# Altium PCB 324 Electrode Wafer PCB.PcbDoc (part 1 of 2)
Units mm, origin at the board's own origin, x right, y up, seen from the top; angles counter-clockwise.
Board outline 565 x 565 mm, 2 copper layers (Top Layer, Bottom Layer); 5 components, 324 nets, 648 pads, 0 vias.
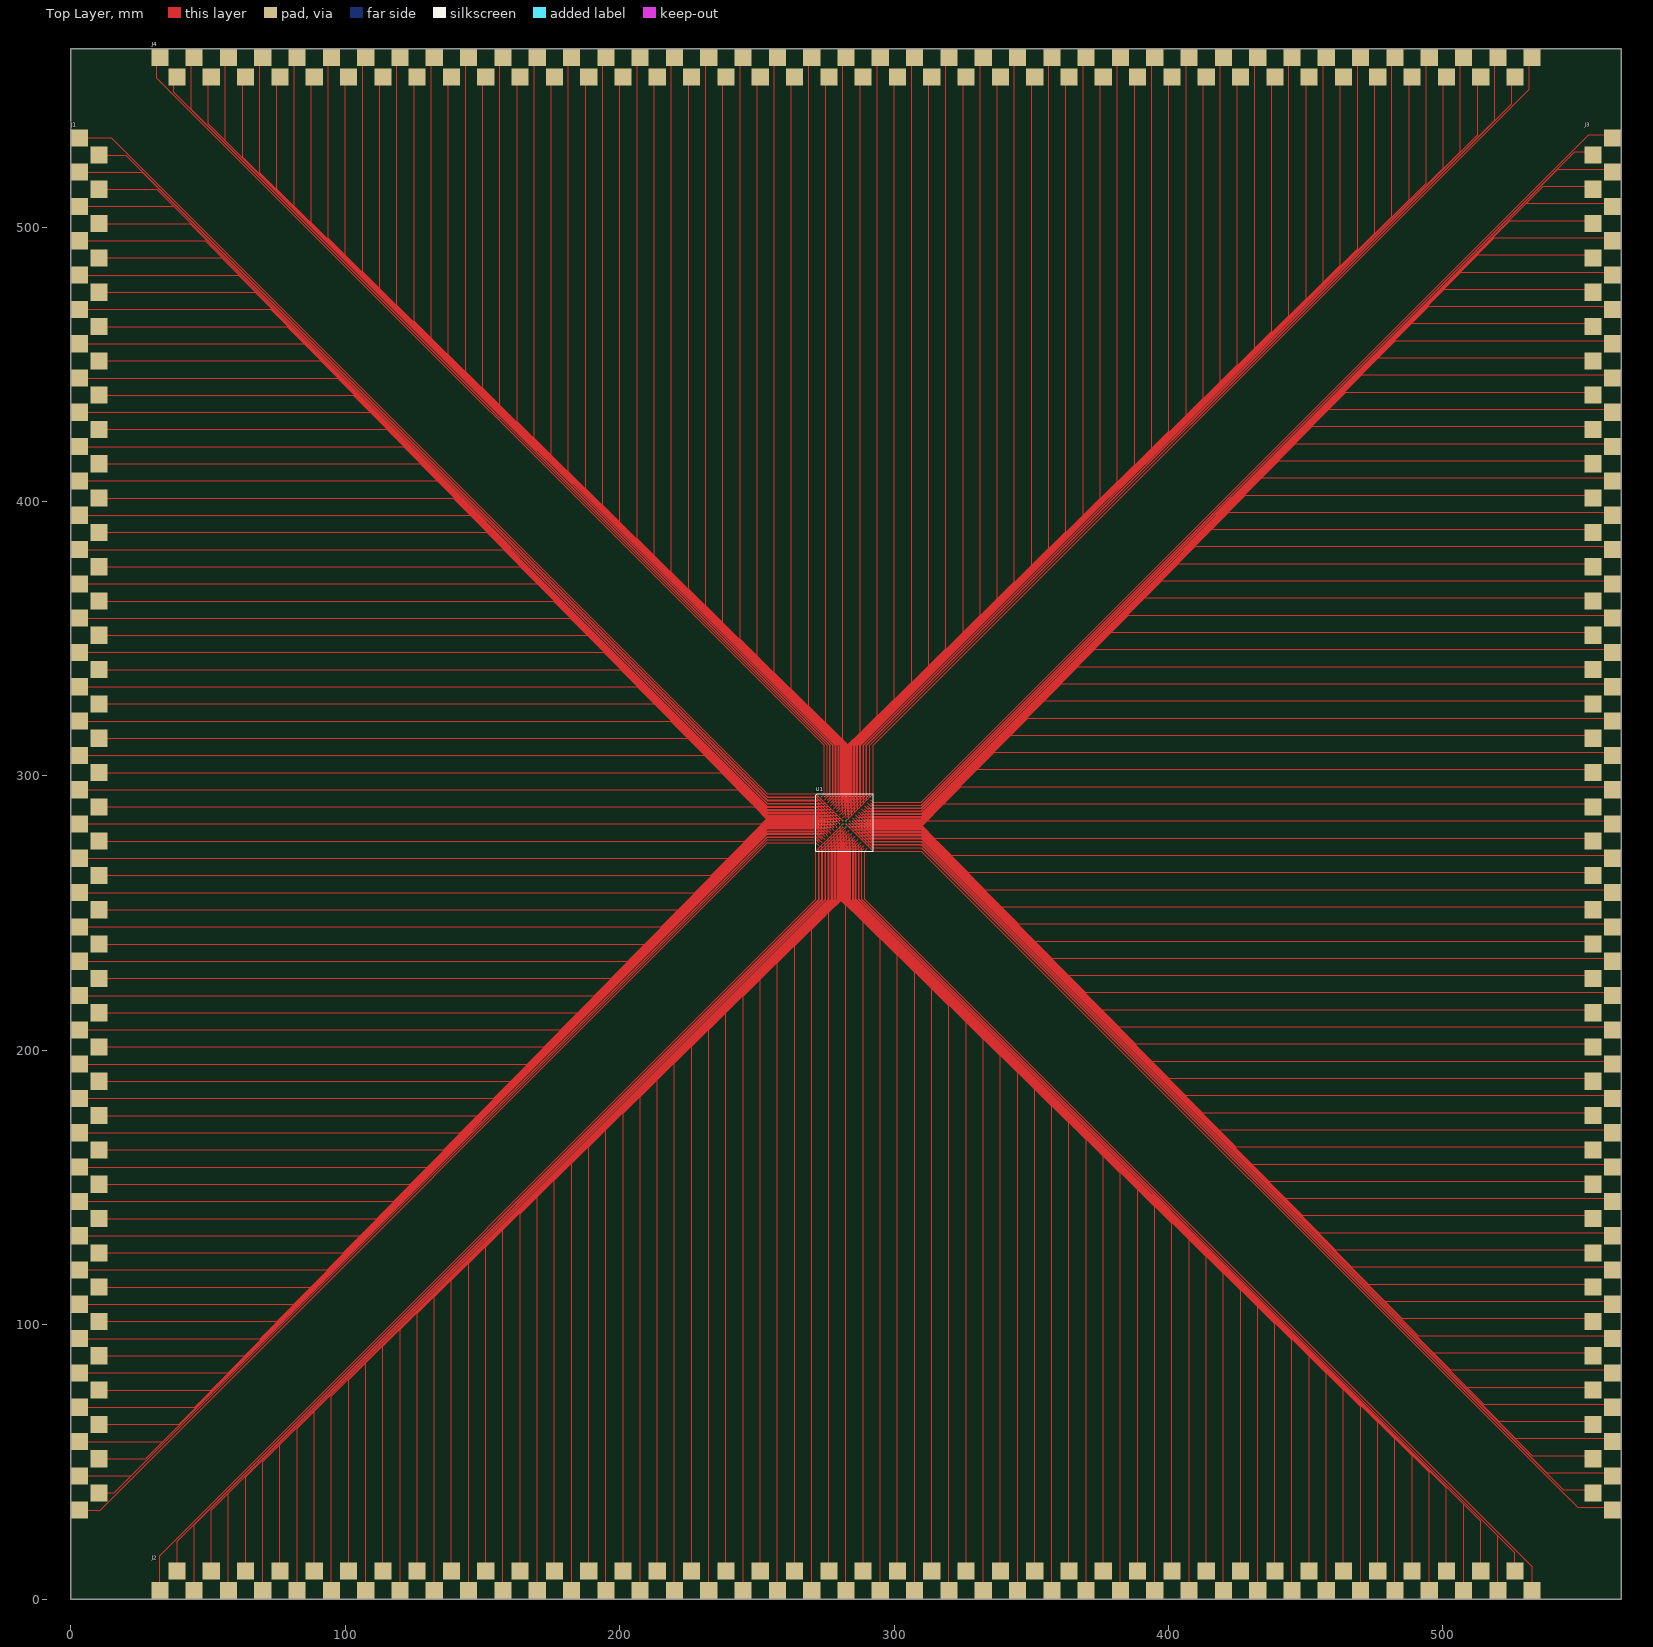
[diagram p0: Top Layer view]
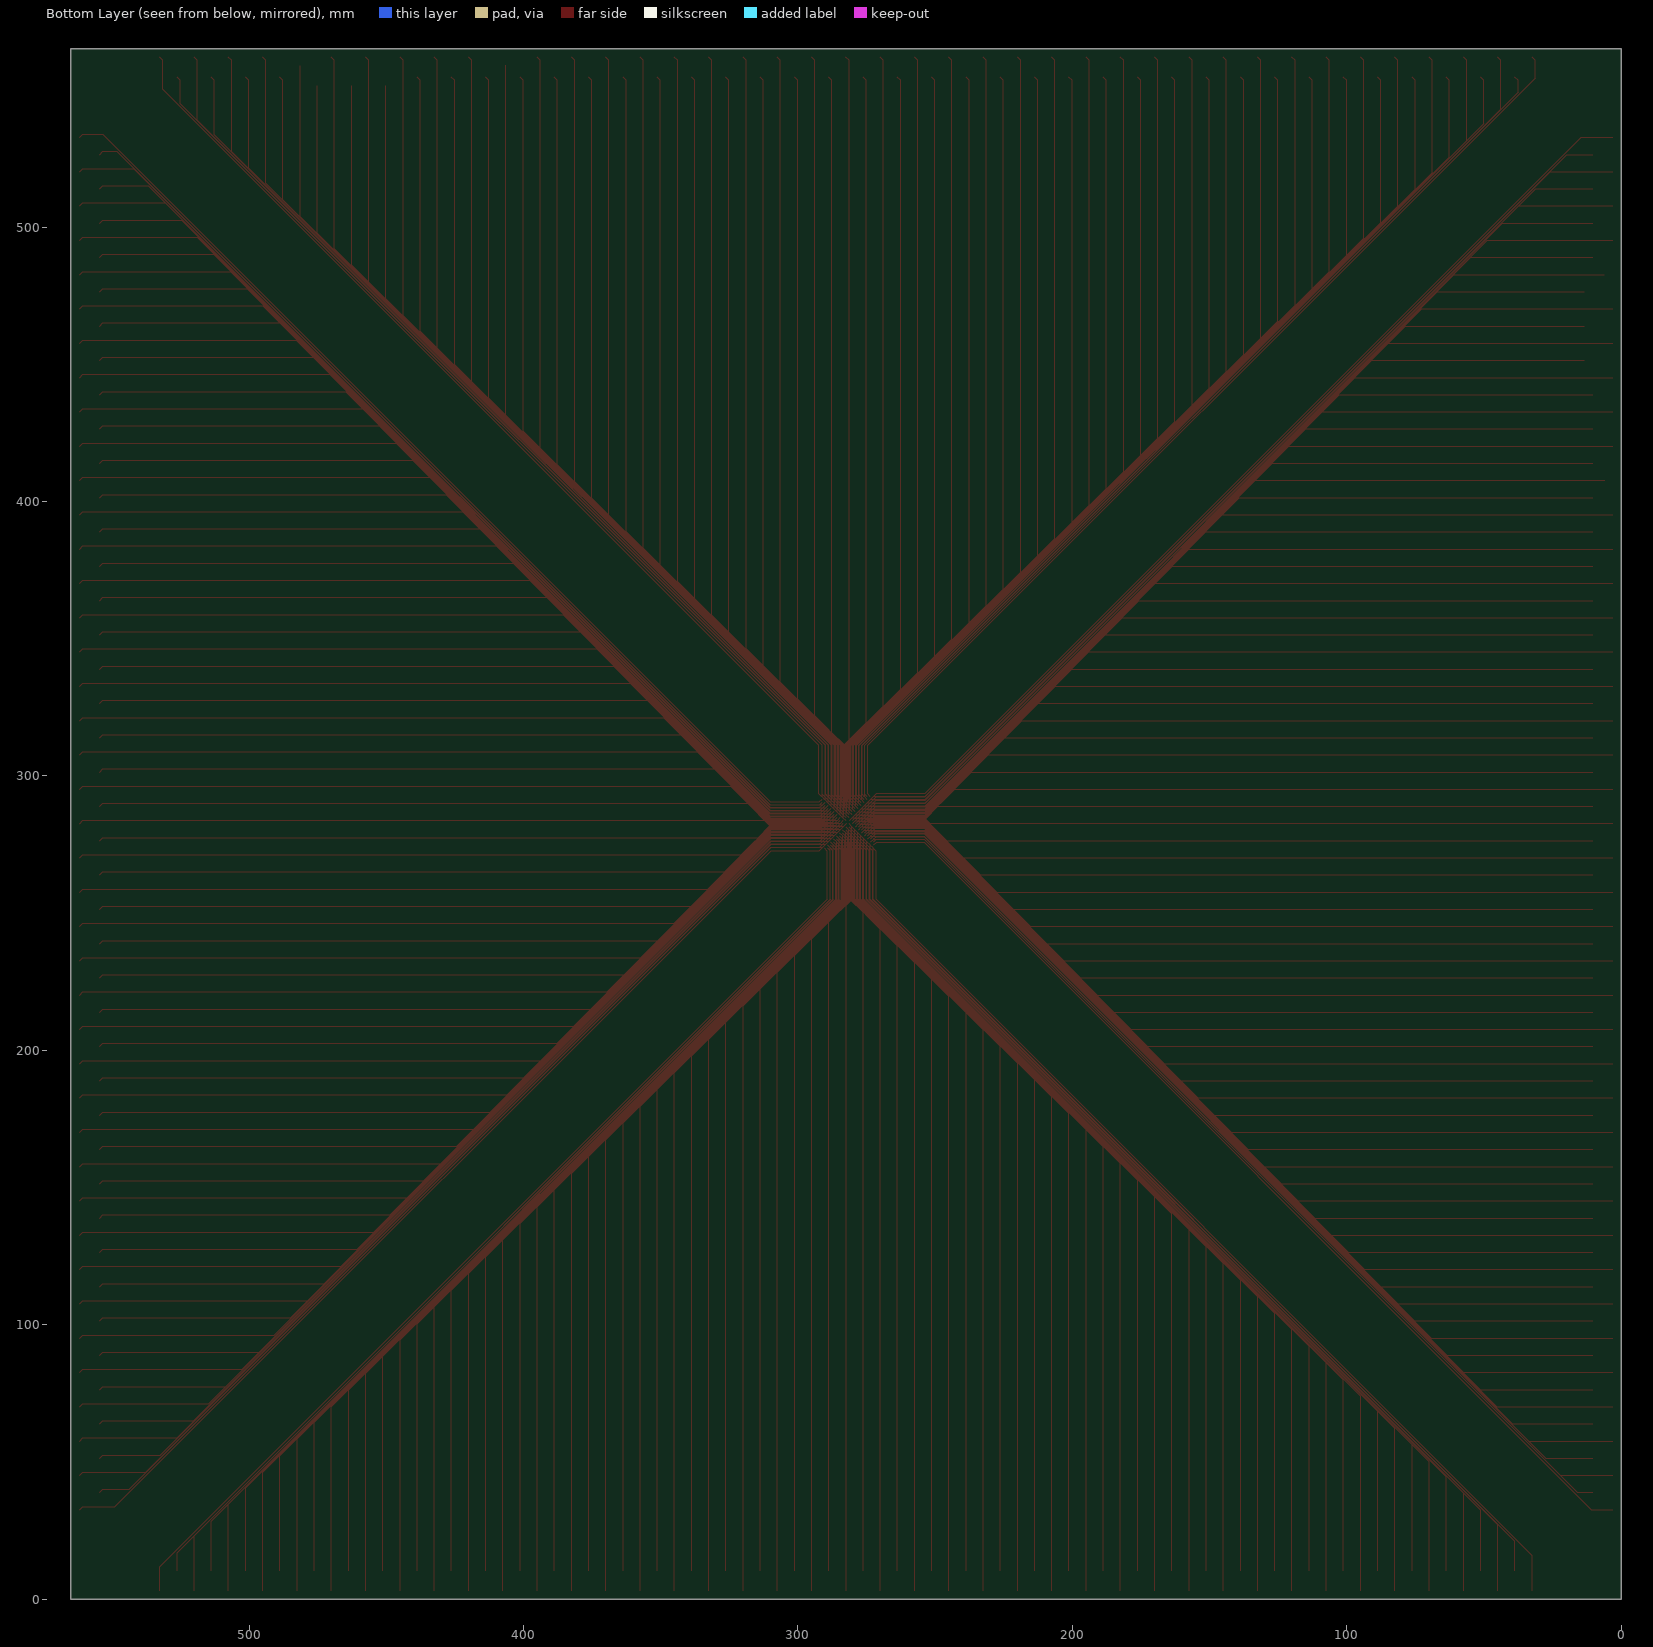
[diagram p1: Bottom Layer view, seen from below]

## Layer stack, top to bottom
Top Solder: solder mask 0.0102, Solder Resist, Dk 3.5
Top Layer: signal copper 0.0356
Dielectric 1: dielectric 0.32, FR-4, Dk 4.8
Bottom Layer: signal copper 0.0356
Bottom Solder: solder mask 0.0102, Solder Resist, Dk 3.5

## Board outline
0,0 565,0 565,565 0,565

## Design rules (kind name [scope] priority, off if disabled: settings)
Clearance [All] p1: gap=0.254 ignorepadtopadclearanceinfootprint=FALSE except(0: Arc-Hole Track-Hole SMDPad-Hole THPad-Hole Via-Hole Fill-Hole Poly-Hole Region-Hole Text-Hole; 0.03: Arc-Arc Arc-Track Arc-SMDPad Arc-THPad Arc-Via Track-Track Track-SMDPad Track-THPad Track-Via)
PolygonConnect [All] p1: connectstyle=Relief reliefconductorwidth=0.254 reliefentries=4 polygonreliefangle="90 Angle" airgapwidth=0.254
RoutingVias [All] p1: holewidth=0.711 width=1.27 viastyle="Through Hole" minholewidth=0.711 minwidth=1.27 maxholewidth=0.711 maxwidth=1.27
SolderMaskExpansion [All] p1: expansion=0.102 istentingtop=FALSE
Width [All] p1: maxlimit=0.254 minlimit=0.05 preferedwidth=0.254 toplayer_maxwidth=0.05 toplayer_prefwidth=0.05 bottomlayer_minwidth=0.254 minimp=50.000000 maximp=50.000000 favimp=50.000000
30 further rules are at their usual default settings.

## Classes and differential pairs
component class "324 Electrode Wafer Schematic": J1 J2 J3 J4

## Components (designator, comment, footprint, x,y, rotation, side; value= is the part's Value field where it differs from the comment)
J1 "Bond Pads (81)" "Bond Pads (81)" 3.125,-76.5 r0 top
J2 "Bond Pads (81)" "Bond Pads (81)" 641.5,3.125 r90 top
J3 "Bond Pads (81)" "Bond Pads (81)" 561.875,641.5 r180 top
J4 "Bond Pads (81)" "Bond Pads (81)" -76.5,561.875 r270 top
U1 "Sensing Electrodes (324)" "Sensing Area (324)" 272.5,292.5 r0 top

## Footprints (in the part's own frame and the unit in brackets; to place one, negate y for a bottom-side part, rotate by r counter-clockwise, add the part's x,y. Pads: shape width x height; smd on the part's side, far side on the other; paste and mask are expansions set on the pad)
"Bond Pads (81)" [mm]
  rect 6.25x6.25 smd: 1(0,109) 2(7.25,115.25) 3(0,121.5) 4(7.25,127.75) 5(0,134) 6(7.25,140.25) 7(0,146.5) 8(7.25,152.75) 9(0,159) 10(7.25,165.25) 11(0,171.5) 12(7.25,177.75) 13(0,184) 14(7.25,190.25) 15(0,196.5) 16(7.25,202.75) 17(0,209) 18(7.25,215.25) 19(0,221.5) 20(7.25,227.75) 21(0,234) 22(7.25,240.25) 23(0,246.5) 24(7.25,252.75) 25(0,259) 26(7.25,265.25) 27(0,271.5) 28(7.25,277.75) 29(0,284) 30(7.25,290.25) 31(0,296.5) 32(7.25,302.75) 33(0,309) 34(7.25,315.25) 35(0,321.5) 36(7.25,327.75) 37(0,334) 38(7.25,340.25) 39(0,346.5) 40(7.25,352.75) 41(0,359) 42(7.25,365.25) 43(0,371.5) 44(7.25,377.75) 45(0,384) 46(7.25,390.25) 47(0,396.5) 48(7.25,402.75) 49(0,409) 50(7.25,415.25) 51(0,421.5) 52(7.25,427.75) 53(0,434) 54(7.25,440.25) 55(0,446.5) 56(7.25,452.75) 57(0,459) 58(7.25,465.25) 59(0,471.5) 60(7.25,477.75) 61(0,484) 62(7.25,490.25) 63(0,496.5) 64(7.25,502.75) 65(0,509) 66(7.25,515.25) 67(0,521.5) 68(7.25,527.75) 69(0,534) 70(7.25,540.25) 71(0,546.5) 72(7.25,552.75) 73(0,559) 74(7.25,565.25) 75(0,571.5) 76(7.25,577.75) 77(0,584) 78(7.25,590.25) 79(0,596.5) 80(7.25,602.75) 81(0,609)
"Sensing Area (324)" [mm]
  round 0.1 smd: 1(0,0) 2(1.111,0) 3(2.222,0) 4(3.333,0) 5(4.444,0) 6(5.556,0) 7(6.667,0) 8(7.778,0) 9(8.889,0) 10(10,0) 11(11.111,0) 12(12.222,0) 13(13.333,0) 14(14.444,0) 15(15.556,0) 16(16.667,0) 17(17.778,0) 18(18.889,0) 19(0,-1.111) 20(1.111,-1.111) 21(2.222,-1.111) 22(3.333,-1.111) 23(4.444,-1.111) 24(5.556,-1.111) 25(6.667,-1.111) 26(7.778,-1.111) 27(8.889,-1.111) 28(10,-1.111) 29(11.111,-1.111) 30(12.222,-1.111) 31(13.333,-1.111) 32(14.444,-1.111) 33(15.556,-1.111) 34(16.667,-1.111) 35(17.778,-1.111) 36(18.889,-1.111) 37(0,-2.222) 38(1.111,-2.222) 39(2.222,-2.222) 40(3.333,-2.222) 41(4.444,-2.222) 42(5.556,-2.222) 43(6.667,-2.222) 44(7.778,-2.222) 45(8.889,-2.222) 46(10,-2.222) 47(11.111,-2.222) 48(12.222,-2.222) 49(13.333,-2.222) 50(14.444,-2.222) 51(15.556,-2.222) 52(16.667,-2.222) 53(17.778,-2.222) 54(18.889,-2.222) 55(0,-3.333) 56(1.111,-3.333) 57(2.222,-3.333) 58(3.333,-3.333) 59(4.444,-3.333) 60(5.556,-3.333) 61(6.667,-3.333) 62(7.778,-3.333) 63(8.889,-3.333) 64(10,-3.333) 65(11.111,-3.333) 66(12.222,-3.333) 67(13.333,-3.333) 68(14.444,-3.333) 69(15.556,-3.333) 70(16.667,-3.333) 71(17.778,-3.333) 72(18.889,-3.333) 73(0,-4.444) 74(1.111,-4.444) 75(2.222,-4.444) 76(3.333,-4.444) 77(4.444,-4.444) 78(5.556,-4.444) 79(6.667,-4.444) 80(7.778,-4.444) 81(8.889,-4.444) 82(10,-4.444) 83(11.111,-4.444) 84(12.222,-4.444) 85(13.333,-4.444) 86(14.444,-4.444) 87(15.556,-4.444) 88(16.667,-4.444) 89(17.778,-4.444) 90(18.889,-4.444) 91(0,-5.556) 92(1.111,-5.556) 93(2.222,-5.556) 94(3.333,-5.556) 95(4.444,-5.556) 96(5.556,-5.556) 97(6.667,-5.556) 98(7.778,-5.556) 99(8.889,-5.556) 100(10,-5.556) 101(11.111,-5.556) 102(12.222,-5.556) 103(13.333,-5.556) 104(14.444,-5.556) 105(15.556,-5.556) 106(16.667,-5.556) 107(17.778,-5.556) 108(18.889,-5.556) 109(0,-6.667) 110(1.111,-6.667) 111(2.222,-6.667) 112(3.333,-6.667) 113(4.444,-6.667) 114(5.556,-6.667) 115(6.667,-6.667) 116(7.778,-6.667) 117(8.889,-6.667) 118(10,-6.667) 119(11.111,-6.667) 120(12.222,-6.667) 121(13.333,-6.667) 122(14.444,-6.667) 123(15.556,-6.667) 124(16.667,-6.667) 125(17.778,-6.667) 126(18.889,-6.667) 127(0,-7.778) 128(1.111,-7.778) 129(2.222,-7.778) 130(3.333,-7.778) 131(4.444,-7.778) 132(5.556,-7.778) 133(6.667,-7.778) 134(7.778,-7.778) 135(8.889,-7.778) 136(10,-7.778) 137(11.111,-7.778) 138(12.222,-7.778) 139(13.333,-7.778) 140(14.444,-7.778) 141(15.556,-7.778) 142(16.667,-7.778) 143(17.778,-7.778) 144(18.889,-7.778) 145(0,-8.889) 146(1.111,-8.889) 147(2.222,-8.889) 148(3.333,-8.889) 149(4.444,-8.889) 150(5.556,-8.889) 151(6.667,-8.889) 152(7.778,-8.889) 153(8.889,-8.889) 154(10,-8.889) 155(11.111,-8.889) 156(12.222,-8.889) 157(13.333,-8.889) 158(14.444,-8.889) 159(15.556,-8.889) 160(16.667,-8.889) 161(17.778,-8.889) 162(18.889,-8.889) 163(0,-10) 164(1.111,-10) 165(2.222,-10) 166(3.333,-10) 167(4.444,-10) 168(5.556,-10) 169(6.667,-10) 170(7.778,-10) 171(8.889,-10) 172(10,-10) 173(11.111,-10) 174(12.222,-10) 175(13.333,-10) 176(14.444,-10) 177(15.556,-10) 178(16.667,-10) 179(17.778,-10) 180(18.889,-10) 181(0,-11.111) 182(1.111,-11.111) 183(2.222,-11.111) 184(3.333,-11.111) 185(4.444,-11.111) 186(5.556,-11.111) 187(6.667,-11.111) 188(7.778,-11.111) 189(8.889,-11.111) 190(10,-11.111) 191(11.111,-11.111) 192(12.222,-11.111) 193(13.333,-11.111) 194(14.444,-11.111) 195(15.556,-11.111) 196(16.667,-11.111) 197(17.778,-11.111) 198(18.889,-11.111) 199(0,-12.222) 200(1.111,-12.222) 201(2.222,-12.222) 202(3.333,-12.222) 203(4.444,-12.222) 204(5.556,-12.222) 205(6.667,-12.222) 206(7.778,-12.222) 207(8.889,-12.222) 208(10,-12.222) 209(11.111,-12.222) 210(12.222,-12.222) 211(13.333,-12.222) 212(14.444,-12.222) 213(15.556,-12.222) 214(16.667,-12.222) 215(17.778,-12.222) 216(18.889,-12.222) 217(0,-13.333) 218(1.111,-13.333) 219(2.222,-13.333) 220(3.333,-13.333) 221(4.444,-13.333) 222(5.556,-13.333) 223(6.667,-13.333) 224(7.778,-13.333) 225(8.889,-13.333) 226(10,-13.333) 227(11.111,-13.333) 228(12.222,-13.333) 229(13.333,-13.333) 230(14.444,-13.333) 231(15.556,-13.333) 232(16.667,-13.333) 233(17.778,-13.333) 234(18.889,-13.333) 235(0,-14.444) 236(1.111,-14.444) 237(2.222,-14.444) 238(3.333,-14.444) 239(4.444,-14.444) 240(5.556,-14.444) 241(6.667,-14.444) 242(7.778,-14.444) 243(8.889,-14.444) 244(10,-14.444) 245(11.111,-14.444) 246(12.222,-14.444) 247(13.333,-14.444) 248(14.444,-14.444) 249(15.556,-14.444) 250(16.667,-14.444) 251(17.778,-14.444) 252(18.889,-14.444) 253(0,-15.556) 254(1.111,-15.556) 255(2.222,-15.556) 256(3.333,-15.556) 257(4.444,-15.556) 258(5.556,-15.556) 259(6.667,-15.556) 260(7.778,-15.556) 261(8.889,-15.556) 262(10,-15.556) 263(11.111,-15.556) 264(12.222,-15.556) 265(13.333,-15.556) 266(14.444,-15.556) 267(15.556,-15.556) 268(16.667,-15.556) 269(17.778,-15.556) 270(18.889,-15.556) 271(0,-16.667) 272(1.111,-16.667) 273(2.222,-16.667) 274(3.333,-16.667) 275(4.444,-16.667) 276(5.556,-16.667) 277(6.667,-16.667) 278(7.778,-16.667) 279(8.889,-16.667) 280(10,-16.667) 281(11.111,-16.667) 282(12.222,-16.667) 283(13.333,-16.667) 284(14.444,-16.667) 285(15.556,-16.667) 286(16.667,-16.667) 287(17.778,-16.667) 288(18.889,-16.667) 289(0,-17.778) 290(1.111,-17.778) 291(2.222,-17.778) 292(3.333,-17.778) 293(4.444,-17.778) 294(5.556,-17.778) 295(6.667,-17.778) 296(7.778,-17.778) 297(8.889,-17.778) 298(10,-17.778) 299(11.111,-17.778) 300(12.222,-17.778) 301(13.333,-17.778) 302(14.444,-17.778) 303(15.556,-17.778) 304(16.667,-17.778) 305(17.778,-17.778) 306(18.889,-17.778) 307(0,-18.889) 308(1.111,-18.889) 309(2.222,-18.889) 310(3.333,-18.889) 311(4.444,-18.889) 312(5.556,-18.889) 313(6.667,-18.889) 314(7.778,-18.889) 315(8.889,-18.889) 316(10,-18.889) 317(11.111,-18.889) 318(12.222,-18.889) 319(13.333,-18.889) 320(14.444,-18.889) 321(15.556,-18.889) 322(16.667,-18.889) 323(17.778,-18.889) 324(18.889,-18.889)
  silkscreen extent -1.11,-20 20,1.11

## Part data
J1 J2 J3 J4: "81 pads for all four sides of the chip", Part Number="Bond Pads (81)"
U1: library part "Silicon Die Holder 324 Electrodes", "324 Electrodes covering a 2mm by 2mm sensing 10x", Part Number="Silicon Die Holder 324 Electrodes"

## Nets (pads, with @x,y where several pads share a name; then routed paths per layer and width w, separated by ;. In a path a pad name is that pad's centre, name@x,y a point inside that pad or via, vN(x,y) a via of type N, cw(c..) or ccw(c..) an arc to the next point about the centre after c; other vN are vias at no path point)
NetJ1_1: J1.23 U1.182 | length 317
  Top Layer w0.05: J1.23@3.125,170 7.039,170 141.989,170 253.844,281.856 273.144,281.856 U1.182@273.611,281.389
NetJ1_2: J1.22 U1.181 | length 311.2
  Top Layer w0.05: J1.22@10.375,163.75 135.883,163.75 253.889,281.756 272.133,281.756 U1.181@272.5,281.389
NetJ1_3: J1.29 U1.163 | length 300.7
  Top Layer w0.05: J1.29@3.125,207.5 178.589,207.5 253.867,282.778 272.222,282.778 U1.163@272.5,282.5
NetJ1_4: J1.30 U1.164 | length 292
  Top Layer w0.05: J1.30@10.375,213.75 14.239,213.75 184.689,213.75 253.817,282.878 273.233,282.878 U1.164@273.611,282.5
NetJ1_5: J1.39 U1.147 | length 277.5
  Top Layer w0.05: J1.39@3.125,270 7.389,270 239.589,270 253.539,283.95 274.383,283.95 U1.147@274.722,283.611
NetJ1_6: J1.35 U1.169 | length 292.3
  Top Layer w0.05: J1.35@3.125,245 7.089,245 215.189,245 253.567,283.378 278.289,283.378 U1.169@279.167,282.5
NetJ1_7: J1.41 U1.149 | length 274.7
  Top Layer w0.05: J1.41@3.125,282.5 6.639,282.5 251.789,282.5 253.439,284.15 276.406,284.15 U1.149@276.944,283.611
NetJ1_8: J1.2 U1.271 | length 361
  Top Layer w0.05: J1.2@10.375,38.75 15.939,38.75 253.883,276.694 271.639,276.694 U1.271@272.5,275.833
NetJ1_9: J1.40 U1.148 | length 268.9
  Top Layer w0.05: J1.40@10.375,276.25 14.289,276.25 245.689,276.25 253.489,284.05 275.394,284.05 U1.148@275.833,283.611
NetJ1_10: J1.42 U1.150 | length 269.8
  Top Layer w0.05: J1.42@10.375,288.75 14.189,288.75 249.189,288.75 253.689,284.25 277.417,284.25 U1.150@278.056,283.611
NetJ1_11: J1.8 U1.236 | length 347.5
  Top Layer w0.05: J1.8@10.375,76.25 51.239,76.25 253.828,278.839 272.828,278.839 U1.236@273.611,278.056
NetJ1_12: J1.10 U1.238 | length 344.7
  Top Layer w0.05: J1.10@10.375,88.75 14.839,88.75 63.439,88.75 253.728,279.039 274.85,279.039 U1.238@275.833,278.056
NetJ1_13: J1.11 U1.217 | length 346.1
  Top Layer w0.05: J1.11@3.125,95 7.589,95 69.139,95 253.85,279.711 271.956,279.711 U1.217@272.5,279.167
NetJ1_14: J1.14 U1.220 | length 334.7
  Top Layer w0.05: J1.14@10.375,113.75 14.839,113.75 87.439,113.75 253.7,280.011 274.989,280.011 U1.220@275.833,279.167
NetJ1_15: J1.15 U1.221 | length 340.5
  Top Layer w0.05: J1.15@3.125,120 93.539,120 253.65,280.111 276,280.111 U1.221@276.944,279.167
NetJ1_16: J1.18 U1.201 | length 323.5
  Top Layer w0.05: J1.18@10.375,138.75 14.089,138.75 111.589,138.75 253.772,280.933 274.067,280.933 U1.201@274.722,280.278
NetJ1_17: J1.19 U1.202 | length 329.4
  Top Layer w0.05: J1.19@3.125,145 7.039,145 117.689,145 253.722,281.033 275.078,281.033 U1.202@275.833,280.278
NetJ1_18: J1.21 U1.204 | length 326.6
  Top Layer w0.05: J1.21@3.125,157.5 7.139,157.5 129.889,157.5 253.622,281.233 277.1,281.233 U1.204@278.056,280.278
NetJ1_19: J1.24 U1.183 | length 308.4
  Top Layer w0.05: J1.24@10.375,176.25 148.089,176.25 253.794,281.956 274.156,281.956 U1.183@274.722,281.389
NetJ1_20: J1.25 U1.184 | length 314.2
  Top Layer w0.05: J1.25@3.125,182.5 8.039,182.5 154.189,182.5 253.744,282.056 275.167,282.056 U1.184@275.833,281.389
NetJ1_21: J1.27 U1.186 | length 311.4
  Top Layer w0.05: J1.27@3.125,195 7.439,195 166.389,195 253.644,282.256 277.189,282.256 U1.186@278.056,281.389
NetJ1_22: J1.28 U1.187 | length 302.8
  Top Layer w0.05: J1.28@10.375,201.25 14.139,201.25 172.489,201.25 253.594,282.356 278.2,282.356 U1.187@279.167,281.389
NetJ1_23: J1.32 U1.166 | length 289.2
  Top Layer w0.05: J1.32@10.375,226.25 14.339,226.25 196.889,226.25 253.717,283.078 275.256,283.078 U1.166@275.833,282.5
NetJ1_24: J1.50 U1.131 | length 288.9
  Top Layer w0.05: J1.50@10.375,338.75 14.439,338.75 200.389,338.75 253.739,285.4 276.267,285.4 U1.131@276.944,284.722
NetJ1_25: J1.34 U1.168 | length 286.4
  Top Layer w0.05: J1.34@10.375,238.75 14.139,238.75 209.089,238.75 253.617,283.278 277.278,283.278 U1.168@278.056,282.5
NetJ1_26: J1.38 U1.146 | length 271.7
  Top Layer w0.05: J1.38@10.375,263.75 14.089,263.75 233.489,263.75 253.589,283.85 273.372,283.85 U1.146@273.611,283.611
NetJ1_27: J1.37 U1.145 | length 280.3
  Top Layer w0.05: J1.37@3.125,257.5 7.389,257.5 227.389,257.5 253.639,283.75 272.361,283.75 U1.145@272.5,283.611
NetJ1_28: J1.5 U1.254 | length 362.1
  Top Layer w0.05: J1.5@3.125,57.5 7.489,57.5 33.489,57.5 253.806,277.817 272.739,277.817 U1.254@273.611,276.944
NetJ1_29: J1.1 U1.289 | length 370.5
  Top Layer w0.05: J1.1@3.125,32.5 10.717,32.5 253.889,275.672 271.539,275.672 U1.289@272.489,274.722
NetJ1_30: J1.7 U1.235 | length 356.1
  Top Layer w0.05: J1.7@3.125,70 45.15,70 253.889,278.739 271.817,278.739 U1.235@272.5,278.056
NetJ1_31: J1.9 U1.237 | length 353.3
  Top Layer w0.05: J1.9@3.125,82.5 7.089,82.5 57.339,82.5 253.778,278.939 273.839,278.939 U1.237@274.722,278.056
NetJ1_32: J1.12 U1.218 | length 337.5
  Top Layer w0.05: J1.12@10.375,101.25 14.739,101.25 75.239,101.25 253.8,279.811 272.967,279.811 U1.218@273.611,279.167
NetJ1_33: J1.13 U1.219 | length 343.3
  Top Layer w0.05: J1.13@3.125,107.5 7.039,107.5 81.339,107.5 253.75,279.911 273.978,279.911 U1.219@274.722,279.167
NetJ1_34: J1.16 U1.199 | length 326.3
  Top Layer w0.05: J1.16@10.375,126.25 15.089,126.25 99.389,126.25 253.872,280.733 272.044,280.733 U1.199@272.5,280.278
NetJ1_35: J1.17 U1.200 | length 332.2
  Top Layer w0.05: J1.17@3.125,132.5 105.489,132.5 253.822,280.833 273.056,280.833 U1.200@273.611,280.278
NetJ1_36: J1.20 U1.203 | length 320.7
  Top Layer w0.05: J1.20@10.375,151.25 14.139,151.25 123.789,151.25 253.672,281.133 276.089,281.133 U1.203@276.944,280.278
NetJ1_37: J1.4 U1.253 | length 356.3
  Top Layer w0.05: J1.4@10.375,51.25 27.422,51.25 253.889,277.717 271.728,277.717 U1.253@272.5,276.944
NetJ1_38: J1.64 U1.94 | length 323.2
  Top Layer w0.05: J1.64@10.375,426.25 115.239,426.25 253.789,287.7 275.078,287.7 U1.94@275.833,286.944
NetJ1_39: J1.26 U1.185 | length 305.6
  Top Layer w0.05: J1.26@10.375,188.75 14.239,188.75 160.289,188.75 253.694,282.156 276.178,282.156 U1.185@276.944,281.389
NetJ1_40: J1.55 U1.110 | length 305.3
  Top Layer w0.05: J1.55@3.125,370 6.889,370 169.939,370 253.639,286.3 273.144,286.3 U1.110@273.611,285.833
NetJ1_41: J1.54 U1.109 | length 294.4
  Top Layer w0.05: J1.54@10.375,363.75 14.389,363.75 176.039,363.75 253.589,286.2 272.133,286.2 U1.109@272.5,285.833
NetJ1_42: J1.33 U1.167 | length 295.1
  Top Layer w0.05: J1.33@3.125,232.5 7.639,232.5 202.989,232.5 253.667,283.178 276.267,283.178 U1.167@276.944,282.5
NetJ1_43: J1.46 U1.127 | length 274.1
  Top Layer w0.05: J1.46@10.375,313.75 224.789,313.75 253.539,285 272.222,285 U1.127@272.5,284.722
NetJ1_44: J1.73 U1.56 | length 349.1
  Top Layer w0.05: J1.73@6.139,482.5 61.239,482.5 253.789,289.95 272.828,289.95 ; 271.239,289.95 272.828,289.95 ; U1.56@273.611,289.167 272.828,289.95
NetJ1_45: J1.43 U1.151 | length 280.8
  Top Layer w0.05: J1.43@3.125,295 243.089,295 253.739,284.35 278.428,284.35 U1.151@279.167,283.611
NetJ1_46: J1.6 U1.255 | length 353.5
  Top Layer w0.05: J1.6@10.375,63.75 39.589,63.75 253.756,277.917 273.75,277.917 U1.255@274.722,276.944
NetJ1_47: J1.81 U1.1 | length 368.8
  Top Layer w0.05: J1.81@3.125,532.5 14.839,532.5 253.889,293.45 271.539,293.45 U1.1@272.489,292.5
NetJ1_48: J1.80 U1.20 | length 360.5
  Top Layer w0.05: J1.80@10.375,526.25 15.139,526.25 19.989,526.25 253.889,292.35 272.65,292.35 U1.20@273.611,291.389
NetJ1_49: J1.78 U1.39 | length 356.9
  Top Layer w0.05: J1.78@10.375,513.75 14.95,513.75 31.389,513.75 253.889,291.25 273.75,291.25 U1.39@274.722,290.278
NetJ1_50: J1.76 U1.37 | length 349.5
  Top Layer w0.05: J1.76@10.375,501.25 14.089,501.25 43.589,501.25 253.789,291.05 271.728,291.05 U1.37@272.5,290.278
NetJ1_51: J1.74 U1.57 | length 347
  Top Layer w0.05: J1.74@10.375,488.75 13.939,488.75 55.139,488.75 253.839,290.05 273.839,290.05 U1.57@274.722,289.167
NetJ1_52: J1.53 U1.134 | length 307.3
  Top Layer w0.05: J1.53@3.125,357.5 182.089,357.5 253.889,285.7 279.3,285.7 U1.134@280.278,284.722
NetJ1_53: J1.47 U1.128 | length 285.1
  Top Layer w0.05: J1.47@3.125,320 218.689,320 253.589,285.1 273.233,285.1 U1.128@273.611,284.722
NetJ1_54: J1.49 U1.130 | length 292.5
  Top Layer w0.05: J1.49@3.125,332.5 7.889,332.5 206.489,332.5 253.689,285.3 275.256,285.3 U1.130@275.833,284.722
NetJ1_55: J1.66 U1.96 | length 330.6
  Top Layer w0.05: J1.66@10.375,438.75 13.839,438.75 103.039,438.75 253.889,287.9 277.1,287.9 U1.96@278.056,286.944
NetJ1_56: J1.70 U1.76 | length 338.9
  Top Layer w0.05: J1.70@13.439,463.75 78.989,463.75 253.839,288.9 274.989,288.9 ; 271.239,288.9 274.989,288.9 ; U1.76@275.833,288.056 274.989,288.9
NetJ1_57: J1.59 U1.114 | length 320.1
  Top Layer w0.05: J1.59@3.125,395 6.389,395 145.539,395 253.839,286.7 277.189,286.7 U1.114@278.056,285.833
NetJ1_58: J1.56 U1.111 | length 301.8
  Top Layer w0.05: J1.56@10.375,376.25 163.839,376.25 253.689,286.4 274.156,286.4 U1.111@274.722,285.833
NetJ1_59: J1.58 U1.113 | length 309.2
  Top Layer w0.05: J1.58@10.375,388.75 13.889,388.75 151.639,388.75 253.789,286.6 276.178,286.6 U1.113@276.944,285.833
NetJ1_60: J1.31 U1.165 | length 297.9
  Top Layer w0.05: J1.31@3.125,220 7.289,220 190.789,220 253.767,282.978 274.244,282.978 U1.165@274.722,282.5
NetJ1_61: J1.36 U1.170 | length 283.7
  Top Layer w0.05: J1.36@10.375,251.25 14.039,251.25 221.289,251.25 253.517,283.478 279.3,283.478 U1.170@280.278,282.5
NetJ1_62: J1.44 U1.152 | length 277.2
  Top Layer w0.05: J1.44@10.375,301.25 236.989,301.25 253.789,284.45 279.439,284.45 U1.152@280.278,283.611
NetJ1_63: J1.72 U1.55 | length 337.1
  Top Layer w0.05: J1.72@13.439,476.25 67.339,476.25 253.739,289.85 271.817,289.85 ; 271.239,289.85 271.817,289.85 ; U1.55@272.5,289.167 271.817,289.85
NetJ1_64: J1.3 U1.272 | length 366.9
  Top Layer w0.05: J1.3@3.125,45 22.039,45 253.833,276.794 272.65,276.794 U1.272@273.611,275.833
NetJ1_65: J1.79 U1.19 | length 364.1
  Top Layer w0.05: J1.79@3.125,520 6.639,520 26.089,520 253.839,292.25 271.639,292.25 U1.19@272.5,291.389
NetJ1_66: J1.77 U1.38 | length 360.5
  Top Layer w0.05: J1.77@3.125,507.5 6.389,507.5 37.489,507.5 253.839,291.15 272.739,291.15 U1.38@273.611,290.278
NetJ1_67: J1.75 U1.58 | length 358
  Top Layer w0.05: J1.75@3.125,495 6.889,495 49.039,495 253.889,290.15 274.85,290.15 U1.58@275.833,289.167
NetJ1_68: J1.48 U1.129 | length 281.5
  Top Layer w0.05: J1.48@10.375,326.25 212.589,326.25 253.639,285.2 274.244,285.2 U1.129@274.722,284.722
NetJ1_69: J1.71 U1.77 | length 349.2
  Top Layer w0.05: J1.71@3.125,470 6.739,470 72.889,470 253.889,289 276,289 U1.77@276.944,288.056
NetJ1_70: J1.69 U1.75 | length 341.8
  Top Layer w0.05: J1.69@3.125,457.5 6.689,457.5 85.089,457.5 253.789,288.8 273.978,288.8 U1.75@274.722,288.056
NetJ1_71: J1.67 U1.73 | length 334.4
  Top Layer w0.05: J1.67@3.125,445 6.339,445 97.289,445 253.689,288.6 271.956,288.6 U1.73@272.5,288.056
NetJ1_72: J1.65 U1.95 | length 334.1
  Top Layer w0.05: J1.65@3.125,432.5 6.389,432.5 109.139,432.5 253.839,287.8 276.089,287.8 U1.95@276.944,286.944
NetJ1_73: J1.63 U1.93 | length 326.7
  Top Layer w0.05: J1.63@3.125,420 6.439,420 121.339,420 253.739,287.6 274.067,287.6 U1.93@274.722,286.944
NetJ1_74: J1.62 U1.92 | length 315.8
  Top Layer w0.05: J1.62@10.375,413.75 14.289,413.75 127.439,413.75 253.689,287.5 273.056,287.5 U1.92@273.611,286.944
NetJ1_75: J1.60 U1.115 | length 316.6
  Top Layer w0.05: J1.60@10.375,401.25 13.989,401.25 139.439,401.25 253.889,286.8 278.2,286.8 U1.115@279.167,285.833
NetJ1_76: J1.57 U1.112 | length 312.7
  Top Layer w0.05: J1.57@3.125,382.5 6.939,382.5 157.739,382.5 253.739,286.5 275.167,286.5 U1.112@275.833,285.833
NetJ1_77: J1.61 U1.91 | length 317.3
  Top Layer w0.05: J1.61@5.989,407.5 133.539,407.5 253.639,287.4 272.044,287.4 ; 271.239,287.4 272.044,287.4 ; U1.91@272.5,286.944 272.044,287.4
NetJ1_78: J1.51 U1.132 | length 299.9
  Top Layer w0.05: J1.51@3.125,345 194.289,345 253.789,285.5 277.278,285.5 U1.132@278.056,284.722
NetJ1_79: J1.52 U1.133 | length 296.3
  Top Layer w0.05: J1.52@10.375,351.25 188.189,351.25 253.839,285.6 278.289,285.6 U1.133@279.167,284.722
NetJ1_80: J1.68 U1.74 | length 329.4
  Top Layer w0.05: J1.68@13.489,451.25 91.189,451.25 253.739,288.7 272.967,288.7 ; 271.239,288.7 272.967,288.7 ; U1.74@273.611,288.056 272.967,288.7
NetJ1_81: J1.45 U1.153 | length 288.2
  Top Layer w0.05: J1.45@3.125,307.5 3.225,307.6 230.8,307.6 253.85,284.55 280.45,284.55 U1.153@281.389,283.611
NetJ2_1: J2.30 U1.298 | length 293.1
  Top Layer w0.05: U1.298@282.5,274.722 282.122,274.344 282.122,254.928 351.25,185.8 351.25,15.35 J2.30@351.25,10.375
NetJ2_2: J2.33 U1.244 | length 296.2
  Top Layer w0.05: U1.244@282.5,278.056 281.822,277.378 281.822,254.778 332.5,204.1 332.5,8.75 J2.33@332.5,3.125
NetJ2_3: J2.32 U1.262 | length 290.3
  Top Layer w0.05: U1.262@282.5,276.944 281.922,276.367 281.922,254.828 338.75,198 338.75,15.45 J2.32@338.75,10.375
NetJ2_4: J2.37 U1.315 | length 281.4
  Top Layer w0.05: U1.315@281.389,273.611 281.25,273.472 281.25,254.75 307.5,228.5 307.5,8.5 J2.37@307.5,3.125
NetJ2_5: J2.34 U1.226 | length 287.6
  Top Layer w0.05: U1.226@282.5,279.167 281.722,278.389 281.722,254.728 326.25,210.2 326.25,15.25 J2.34@326.25,10.375
NetJ2_6: J2.5 U1.303 | length 363.2
  Top Layer w0.05: U1.303@288.056,274.722 287.183,273.85 287.183,254.917 507.5,34.6 507.5,8.6 J2.5@507.5,3.125
NetJ2_7: J2.36 U1.190 | length 284.8
  Top Layer w0.05: U1.190@282.5,281.389 281.522,280.411 281.522,254.628 313.75,222.4 313.75,14.5 J2.36@313.75,10.375
NetJ2_8: J2.35 U1.208 | length 293.4
  Top Layer w0.05: U1.208@282.5,280.278 281.622,279.4 281.622,254.678 320,216.3 320,8.2 J2.35@320,3.125
NetJ2_9: J2.38 U1.297 | length 272.8
  Top Layer w0.05: U1.297@281.389,274.722 281.15,274.483 281.15,254.7 301.25,234.6 301.25,15.2 ; J2.38@301.25,10.375 301.25,15.2
NetJ2_10: J2.43 U1.207 | length 281.9
  Top Layer w0.05: J2.43@270,3.125 270,9.4 270,244.2 280.65,254.85 280.65,279.539 U1.207@281.389,280.278
NetJ2_11: J2.45 U1.171 | length 289.3
  Top Layer w0.05: J2.45@257.5,3.125 257.5,10.05 257.5,232 280.45,254.95 280.45,281.561 U1.171@281.389,282.5
NetJ2_12: J2.13 U1.283 | length 344.4
  Top Layer w0.05: U1.283@285.833,275.833 285.089,275.089 285.089,254.861 457.5,82.45 457.5,8.15 J2.13@457.5,3.125
NetJ2_13: J2.56 U1.277 | length 302.9
  Top Layer w0.05: J2.56@188.75,10.375 188.75,15.5 188.75,164.95 278.6,254.8 278.6,275.267 U1.277@279.167,275.833
NetJ2_14: J2.54 U1.313 | length 295.5
  Top Layer w0.05: J2.54@201.25,10.375 201.25,15.1 201.25,177.15 278.8,254.7 278.8,273.244 U1.313@279.167,273.611
NetJ2_15: J2.40 U1.261 | length 270
  Top Layer w0.05: U1.261@281.389,276.944 280.95,276.506 280.95,254.6 288.75,246.8 288.75,15.1 J2.40@288.75,10.375
NetJ2_16: J2.7 U1.320 | length 357.2
  Top Layer w0.05: U1.320@286.944,273.611 286.261,272.928 286.261,255 495,46.261 495,8 J2.7@495,3.125
NetJ2_17: J2.10 U1.266 | length 345.8
  Top Layer w0.05: U1.266@286.944,276.944 285.961,275.961 285.961,254.839 476.25,64.55 476.25,15.95 J2.10@476.25,10.375
NetJ2_18: J2.17 U1.300 | length 333.3
  Top Layer w0.05: U1.300@284.722,274.722 284.167,274.167 284.167,254.933 432.5,106.6 432.5,7.8 J2.17@432.5,3.125
NetJ2_19: J2.24 U1.281 | length 309.5
  Top Layer w0.05: U1.281@283.611,275.833 283.044,275.267 283.044,254.906 388.75,149.2 388.75,15.55 J2.24@388.75,10.375
NetJ2_20: J2.27 U1.227 | length 312.5
  Top Layer w0.05: U1.227@283.611,279.167 282.744,278.3 282.744,254.756 370,167.5 370,8.25 J2.27@370,3.125
NetJ2_21: J2.26 U1.245 | length 306.7
  Top Layer w0.05: U1.245@283.611,278.056 282.844,277.289 282.844,254.806 376.25,161.4 376.25,15.35 J2.26@376.25,10.375
NetJ2_22: J2.53 U1.188 | length 308.4
  Top Layer w0.05: J2.53@207.5,3.125 207.5,7.75 207.5,183.2 279.3,255 279.3,280.411 U1.188@280.278,281.389
NetJ2_23: J2.29 U1.316 | length 301.8
  Top Layer w0.05: U1.316@282.5,273.611 282.222,273.333 282.222,254.978 357.5,179.7 357.5,8.55 J2.29@357.5,3.125
NetJ2_24: J2.28 U1.209 | length 303.9
  Top Layer w0.05: U1.209@283.611,280.278 282.644,279.311 282.644,254.706 363.75,173.6 363.75,14.95 J2.28@363.75,10.375
NetJ2_25: J2.31 U1.280 | length 299
  Top Layer w0.05: U1.280@282.5,275.833 282.022,275.356 282.022,254.878 345,191.9 345,7.7 J2.31@345,3.125
NetJ2_26: J2.9 U1.284 | length 354.4
  Top Layer w0.05: U1.284@286.944,275.833 286.061,274.95 286.061,254.889 482.5,58.45 482.5,8.2 J2.9@482.5,3.125
NetJ2_27: J2.70 U1.257 | length 339.3
  Top Layer w0.05: J2.70@101.25,10.375 101.25,14.25 101.25,80.1 276.1,254.95 276.1,276.1 U1.257@276.944,276.944
NetJ2_28: J2.73 U1.292 | length 351.7
  Top Layer w0.05: J2.73@82.5,3.125 82.5,7.25 82.5,62.35 275.05,254.9 275.05,273.939 U1.292@275.833,274.722
NetJ2_29: J2.20 U1.246 | length 321.8
  Top Layer w0.05: U1.246@284.722,278.056 283.867,277.2 283.867,254.783 413.75,124.9 413.75,14.85 J2.20@413.75,10.375
NetJ2_30: J2.48 U1.278 | length 282.7
  Top Layer w0.05: J2.48@238.75,10.375 238.75,213.7 279.8,254.75 279.8,275.356 U1.278@280.278,275.833
NetJ2_31: J2.50 U1.242 | length 290.1
  Top Layer w0.05: J2.50@226.25,10.375 226.25,15.55 226.25,201.5 279.6,254.85 279.6,277.378 U1.242@280.278,278.056
NetJ2_32: J2.47 U1.296 | length 286.2
  Top Layer w0.05: J2.47@245,3.125 245,219.8 279.9,254.7 279.9,274.344 U1.296@280.278,274.722
NetJ2_33: J2.46 U1.314 | length 275.3
  Top Layer w0.05: J2.46@251.25,10.375 251.25,15.75 251.25,225.9 280,254.65 280,273.333 U1.314@280.278,273.611
NetJ2_34: J2.44 U1.189 | length 278.3
  Top Layer w0.05: J2.44@263.75,10.375 263.75,238.1 280.55,254.9 280.55,280.55 U1.189@281.389,281.389
NetJ2_35: J2.42 U1.225 | length 270.9
  Top Layer w0.05: J2.42@276.25,10.375 276.25,15.3 276.25,250.3 280.75,254.8 280.75,278.528 U1.225@281.389,279.167
NetJ2_36: J2.41 U1.243 | length 275.8
  Top Layer w0.05: U1.243@281.389,278.056 280.85,277.517 280.85,254.55 282.5,252.9 282.5,7.75 J2.41@282.5,3.125
NetJ2_37: J2.16 U1.318 | length 327.4
  Top Layer w0.05: U1.318@284.722,273.611 284.267,273.156 284.267,254.983 438.75,100.5 438.75,16.2 J2.16@438.75,10.375
NetJ2_38: J2.15 U1.247 | length 341.6
  Top Layer w0.05: U1.247@285.833,278.056 284.889,277.111 284.889,254.761 445,94.65 445,8.25 J2.15@445,3.125
NetJ2_39: J2.21 U1.228 | length 327.7
  Top Layer w0.05: U1.228@284.722,279.167 283.767,278.211 283.767,254.733 407.5,131 407.5,8.25 J2.21@407.5,3.125
NetJ2_40: J2.19 U1.264 | length 330.5
  Top Layer w0.05: U1.264@284.722,276.944 283.967,276.189 283.967,254.833 420,118.8 420,8.15 J2.19@420,3.125
NetJ2_41: J2.12 U1.301 | length 338.6
  Top Layer w0.05: U1.301@285.833,274.722 285.189,274.078 285.189,254.911 463.75,76.35 463.75,15.85 J2.12@463.75,10.375
NetJ2_42: J2.25 U1.263 | length 315.3
  Top Layer w0.05: U1.263@283.611,276.944 282.944,276.278 282.944,254.856 382.5,155.3 382.5,9.15 J2.25@382.5,3.125
NetJ2_43: J2.64 U1.258 | length 324.3
  Top Layer w0.05: J2.64@138.75,10.375 138.75,15.45 138.75,116.35 277.3,254.9 277.3,276.189 U1.258@278.056,276.944
NetJ2_44: J2.78 U1.273 | length 358
  Top Layer w0.05: J2.78@51.25,10.375 51.25,14.2 51.25,32.5 273.75,255 273.75,274.861 U1.273@274.722,275.833
NetJ2_45: J2.76 U1.309 | length 350.6
  Top Layer w0.05: J2.76@63.75,10.375 63.75,14.5 63.75,44.7 273.95,254.9 273.95,272.839 U1.309@274.722,273.611
NetJ2_46: J2.80 U1.290 | length 361.6
  Top Layer w0.05: J2.80@38.75,10.375 38.75,16.25 38.75,21.1 272.65,255 272.65,273.761 U1.290@273.611,274.722
NetJ2_47: J2.72 U1.310 | length 340.7
  Top Layer w0.05: J2.72@88.75,10.375 88.75,14.55 88.75,68.45 275.15,254.85 275.15,272.928 U1.310@275.833,273.611
NetJ2_48: J2.62 U1.294 | length 316.9
  Top Layer w0.05: J2.62@151.25,10.375 151.25,14.75 151.25,128.55 277.5,254.8 277.5,274.167 U1.294@278.056,274.722
NetJ2_49: J2.3 U1.304 | length 368
  Top Layer w0.05: U1.304@289.167,274.722 288.206,273.761 288.206,254.944 520,23.15 520,8.55 J2.3@520,3.125
NetJ2_50: J2.1 U1.323 | length 371.6
  Top Layer w0.05: U1.323@290.278,273.6 289.328,272.65 289.328,255 532.5,11.828 532.5,8.65 J2.1@532.5,3.125
NetJ2_51: J2.49 U1.260 | length 293.6
  Top Layer w0.05: J2.49@232.5,3.125 232.5,9 232.5,207.6 279.7,254.8 279.7,276.367 U1.260@280.278,276.944
NetJ2_52: J2.63 U1.276 | length 327.8
  Top Layer w0.05: J2.63@145,3.125 145,7.55 145,122.45 277.4,254.85 277.4,275.178 U1.276@278.056,275.833
NetJ2_53: J2.52 U1.206 | length 297.5
  Top Layer w0.05: J2.52@213.75,10.375 213.75,189.3 279.4,254.95 279.4,279.4 U1.206@280.278,280.278
NetJ2_54: J2.39 U1.279 | length 278.6
  Top Layer w0.05: U1.279@281.389,275.833 281.05,275.494 281.05,254.65 295,240.7 295,8.5 J2.39@295,3.125
NetJ2_55: J2.55 U1.295 | length 306.5
  Top Layer w0.05: J2.55@195,3.125 195,7.55 195,171.05 278.7,254.75 278.7,274.256 U1.295@279.167,274.722
NetJ2_56: J2.22 U1.317 | length 312.3
  Top Layer w0.05: U1.317@283.611,273.611 283.244,273.244 283.244,255 401.25,136.994 401.25,14.9 J2.22@401.25,10.375
NetJ2_57: J2.58 U1.241 | length 310.3
  Top Layer w0.05: J2.58@176.25,10.375 176.25,15 176.25,152.75 278.4,254.9 278.4,277.289 U1.241@279.167,278.056
NetJ2_58: J2.23 U1.299 | length 318.1
  Top Layer w0.05: U1.299@283.611,274.722 283.144,274.256 283.144,254.956 395,143.1 395,8.15 J2.23@395,3.125
NetJ2_59: J2.60 U1.205 | length 317.7
  Top Layer w0.05: J2.60@163.75,10.375 163.75,14.65 163.75,140.55 278.2,255 278.2,279.311 U1.205@279.167,280.278
NetJ2_60: J2.59 U1.223 | length 321.3
  Top Layer w0.05: J2.59@170,3.125 170,7.05 170,146.65 278.3,254.95 278.3,278.3 U1.223@279.167,279.167
NetJ2_61: J2.8 U1.302 | length 348.6
  Top Layer w0.05: U1.302@286.944,274.722 286.161,273.939 286.161,254.939 488.75,52.35 488.75,16 J2.8@488.75,10.375
NetJ2_62: J2.57 U1.259 | length 313.9
  Top Layer w0.05: J2.57@182.5,3.125 182.5,8.05 182.5,158.85 278.5,254.85 278.5,276.278 U1.259@279.167,276.944
NetJ2_63: J2.79 U1.308 | length 365.2
  Top Layer w0.05: J2.79@45,3.125 45,7.75 45,27.2 272.75,254.95 272.75,272.75 U1.308@273.611,273.611
NetJ2_64: J2.74 U1.274 | length 348.1
  Top Layer w0.05: J2.74@76.25,10.375 76.25,15.05 76.25,56.25 274.95,254.95 274.95,274.95 U1.274@275.833,275.833
NetJ2_65: J2.75 U1.256 | length 359.1
  Top Layer w0.05: J2.75@70,3.125 70,8 70,50.15 274.85,255 274.85,275.961 U1.256@275.833,276.944
NetJ2_66: J2.68 U1.293 | length 331.9
  Top Layer w0.05: J2.68@113.75,10.375 113.75,14.35 113.75,92.3 276.3,254.85 276.3,274.078 U1.293@276.944,274.722